# Altium PCB G1017 G1015 67x39x22mm.PcbDoc
Units mm, origin at the board's own origin, x right, y up, seen from the top; angles counter-clockwise.
Board outline 66.99 x 39 mm, 2 copper layers (Top Layer, Bottom Layer); 32 components, 19 nets, 73 pads, 2 vias.
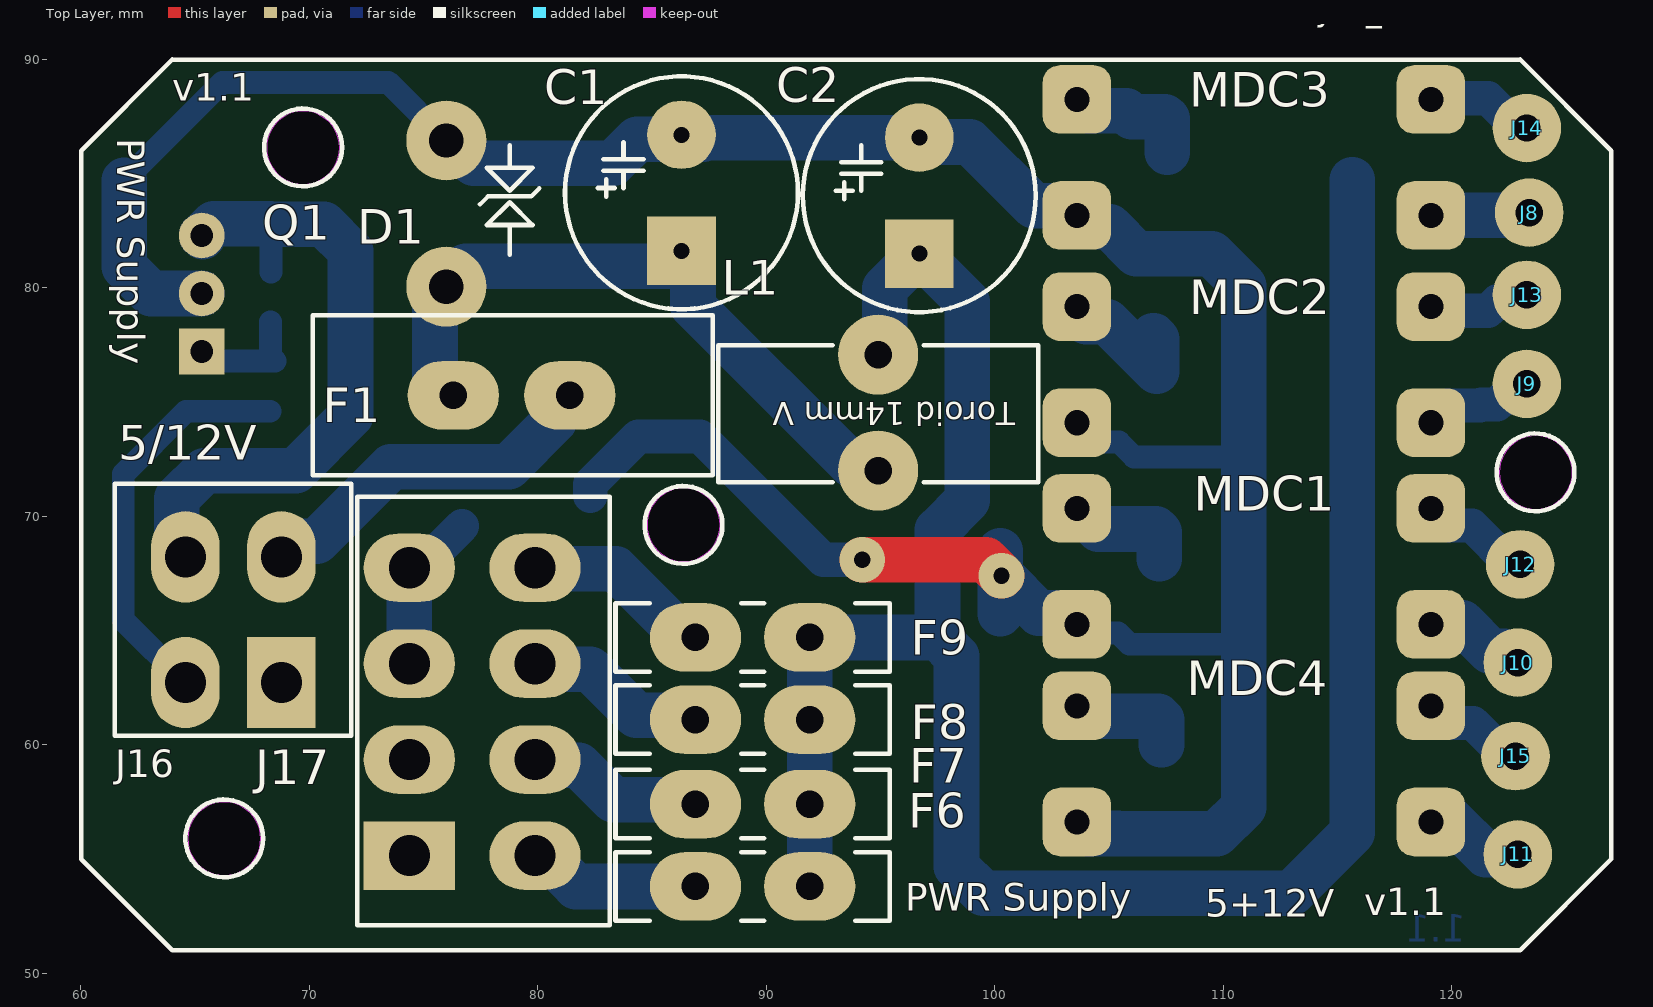
[diagram p0: Top Layer view]
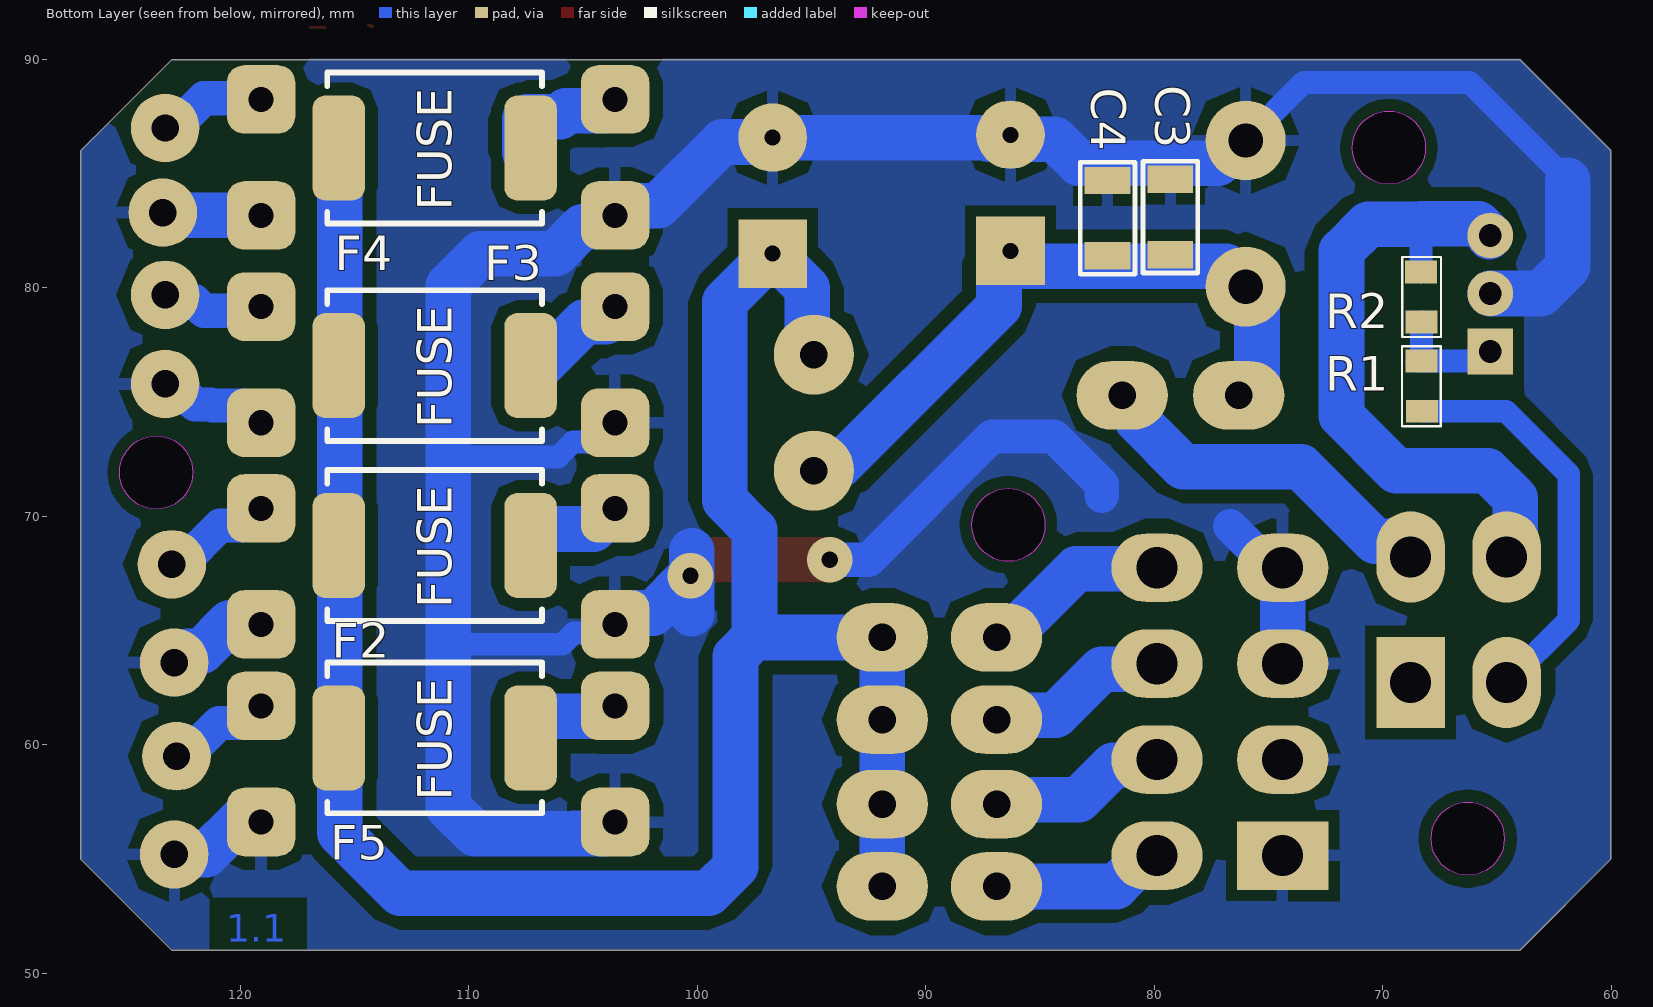
[diagram p1: Bottom Layer view, seen from below]

## Layer stack, top to bottom
Top Solder: solder mask 0.0102, Solder Resist, Dk 3.5
Top Layer: signal copper 0.0356
Dielectric 1: dielectric 0.32, FR-4, Dk 4.8
Bottom Layer: signal copper 0.0356
Bottom Solder: solder mask 0.0102, Solder Resist, Dk 3.5

## Board outline
60.006,55 60.006,86 60.006,86.006 64,90 123,89.998 123,90 127,86 127,55 123,51 64,51
cut-out: 122.088,71.922 ccw(c123.688,71.922) 123.688,70.322 ccw(c123.688,71.922) 125.288,71.922 ccw(c123.688,71.922) 123.688,73.522 ccw(c123.688,71.922)
cut-out: 84.781,69.631 ccw(c86.381,69.631) 86.381,68.031 ccw(c86.381,69.631) 87.981,69.631 ccw(c86.381,69.631) 86.381,71.231 ccw(c86.381,69.631)
cut-out: 68.128,86.138 ccw(c69.728,86.138) 69.728,84.538 ccw(c69.728,86.138) 71.328,86.138 ccw(c69.728,86.138) 69.728,87.738 ccw(c69.728,86.138)
cut-out: 64.672,55.888 ccw(c66.272,55.888) 66.272,54.288 ccw(c66.272,55.888) 67.872,55.888 ccw(c66.272,55.888) 66.272,57.488 ccw(c66.272,55.888)

## Design rules (kind name [scope] priority, off if disabled: settings)
Clearance [All] p1: gap=0.5 ignorepadtopadclearanceinfootprint=FALSE
ComponentClearance [All] p1: gap=0.01 collisioncheckmode=3 verticalgap=0.2 showdistances=FALSE
Height [All] p1: minheight=0 maxheight=25 prefheight=12.7
HoleSize [All] p1: absolutevalues=TRUE maxlimit=3.2 minlimit=0.4 maxpercent=80.000 minpercent=20.000
HoleToHoleClearance [All] p1: gap=0.2 allowstackedmicrovias=TRUE
PlaneClearance [All] p1: clearance=1
PlaneConnect [All] p1: planeconnectstyle=Relief reliefexpansion=0.508 reliefentries=4 reliefconductorwidth=0.5 reliefairgap=0.5
PolygonConnect [All] p1: connectstyle=Relief reliefconductorwidth=0.5 reliefentries=4 polygonreliefangle="90 Angle" airgapwidth=0.5
RoutingVias [All] p1: holewidth=0.7 width=1.5 viastyle="Through Hole" minholewidth=0.4 minwidth=0.4 maxholewidth=3.2 maxwidth=7
SilkToSilkClearance [All] p1: silktosilkclearance=0.05
SilkToSolderMaskClearance [IsPad] p1: minsilkscreentomaskgap=0.2 clearancetoexposedcopper=TRUE
SolderMaskExpansion [All] p1: expansion=0.1 istentingtop=FALSE
Width [All] p1: maxlimit=3 minlimit=0.2 preferedwidth=0.5
22 further rules are at their usual default settings.

## Components (designator, comment, footprint, x,y, rotation, side; value= is the part's Value field where it differs from the comment)
C1 "25V 1000uF" "Cap E p5.08mm D10.2mm (3p)" 86.29,81.625 r90 top
C2 "25V 1000uF" "Cap E p5.08mm D10.2mm (3p)" 96.7,81.5 r90 top
C3 "10nF" "SMD 1206 (3216)" 79.29,81.455 r90 bottom
C4 "100nF" "SMD 1206 (3216)" 82.04,81.405 r90 bottom
D1 "1.5KE20CA" "TVS diode DO-201 V" 75.993,86.455 r270 top
F1 "A" "Fuse RGE1100" 81.4,75.3 r270 top
F2 "2.5A" "Fuse SM250" 115.7,68.725 r180 bottom
F3 "2.5A" "Fuse SM250" 115.7,76.6 r180 bottom
F4 "2.5A" "Fuse SM250" 115.7,86.125 r180 bottom
F5 "2.5A" "Fuse SM250" 115.7,60.3 r180 bottom
F6 "3A" "Fuse MF-R300 (3A)" 86.9,53.8 r90 top
F7 "3 A" "Fuse MF-R300 (3A)" 86.9,57.4 r90 top
F8 "3 A" "Fuse MF-R300 (3A)" 86.9,61.1 r90 top
F9 "3 A" "Fuse MF-R300 (3A)" 86.9,64.7 r90 top
J8 "OnePinC" "OnePin 1.2x3" 123.4,83.3 r0 top
J9 "OnePinC" "OnePin 1.2x3" 123.3,75.8 r0 top
J10 "OnePinC" "OnePin 1.2x3" 122.9,63.6 r0 top
J11 "OnePinC" "OnePin 1.2x3" 122.9,55.2 r0 top
J12 "OnePinC" "OnePin 1.2x3" 123,67.9 r0 top
J13 "OnePinC" "OnePin 1.2x3" 123.3,79.7 r0 top
J14 "OnePinC" "OnePin 1.2x3" 123.3,87 r0 top
J15 "OnePinC" "OnePin 1.2x3" 122.8,59.5 r0 top
J16 "connector" "Molex Mini-Fit Jr - 4Pin V" 64.575,62.725 r90 top
J17 "connector" "Molex Mini-Fit Jr - 8Pin V" 74.375,63.55 r0 top
L1 "Inductor V" "Toroid V D14-W6" 94.9,72 r90 top value=700uH
MDC1 "DC-DC" "DC-DC_MP1584N (SMALL R)" 103.6,70.349 r0 top
MDC2 "DC-DC" "DC-DC_MP1584N (SMALL R)" 103.6,79.18 r0 top
MDC3 "DC-DC" "DC-DC_MP1584N (SMALL R)" 103.6,88.252 r0 top
MDC4 "DC-DC" "DC-DC_MP1584N (SMALL R)" 103.6,61.7 r0 top
Q1 "IRF3205 PBf" TO220-2 65.29,77.215 r0 top
R1 "100 Om" "SMD 0805 (2012)" 68.275,74.675 r90 bottom
R2 "10k Om" "SMD 0805 (2012)" 68.315,80.63 r270 bottom

## Footprints (in the part's own frame and the unit in brackets; to place one, negate y for a bottom-side part, rotate by r counter-clockwise, add the part's x,y. Pads: shape width x height; smd on the part's side, far side on the other; paste and mask are expansions set on the pad)
"Cap E p5.08mm D10.2mm (3p)" [mm] "D 10.2mm; H 17.5mm, Hole: 0.7mm"
  rect 3x3 hole 0.7: 1(0,0)
  round 3 hole 0.7: 2(5.08,0)
  silkscreen extent -2.56,-5.1 7.64,5.1, body extent -2.49,-4.97 7.57,5.08, height 16.53
"DC-DC_MP1584N (SMALL R)" [mm]
  rrect50% 3x3 hole 1.1: GND(0,-5.08) GND(15.5,-5.08) IN(0,0) Out(15.5,0)
  body extent -1.27,-6.35 16.84,1.25, height 11.8
"Fuse MF-R300 (3A)" [mm] "Resettable 11A"
  oval 3x4 hole 1.2: 1(0,0) 2(0,-5)
  silkscreen extent -1.5,-8.5 1.5,3.5, body extent -1.53,-6.19 1.43,1.39, height 15
"Fuse RGE1100" [mm] "Resettable 11A"
  oval 3x4 hole 1.2: 1(0,0) 2(0,-5.1)
  silkscreen extent -3.5,-11.25 3.5,6.25, body extent -1.53,-6.19 1.43,1.39, height 15
"Fuse SM250" [mm] "Resettable 11A"
  rrect50% 2.3x4.6 smd: 1(0,0) 2(8.4,0)
  silkscreen extent -0.5,-3.3 8.9,3.3, body extent -0.5,-3.35 8.9,3.36, height 3
"Molex Mini-Fit Jr - 4Pin V" [mm] "Molex Mega-Fit"
  rect 4x3 hole 1.8: 1(0,-4.2)
  oval 4x3 hole 1.8: 2(0,0) 3(5.5,-4.2) 4(5.5,0)
  silkscreen extent -2.32,-7.25 8.7,3.1, body extent -2.27,-7.27 8.73,3.12, height 12.8
"Molex Mini-Fit Jr - 8Pin V" [mm] "Molex Mega-Fit"
  rect 4x3 hole 1.8: 1(0,-8.4)
  oval 4x3 hole 1.8: 2(0,-4.2) 3(0,0) 4(0,4.2) 5(5.5,-8.4) 6(5.5,-4.2) 7(5.5,0) 8(5.5,4.2)
  silkscreen extent -2.27,-11.45 8.77,7.3, body extent -2.27,-11.5 8.73,7.3, height 12.8
"OnePin 1.2x3" [mm]
  round 3 hole 1.2: 1(0,0)
"SMD 0805 (2012)" [mm]
  rect 1x1.4 smd: 1(-0.075,0) 2(2.125,0.025)
  silkscreen extent -0.72,-0.82 2.78,0.87, body extent 0.03,-0.6 2.03,0.65, height 0.45
"SMD 1206 (3216)" [mm]
  rect 1.2x2 smd: 1(0,0) 2(3.3,0)
  silkscreen extent -0.8,-1.2 4.1,1.2, body extent 0.05,-0.75 3.25,0.85, height 1
TO220-2 [mm]
  rect 2x2 hole 1: 1(0,0)
  round 2 hole 1: 2(0,2.54) 3(0,5.08)
  body extent -2.7,-2.65 1.8,7.75, height 19
"Toroid V D14-W6" [mm] "10mm Black ring TEC.ORG"
  round 3.5 hole 1.2: 1(0,0) 2(5.08,0)
  silkscreen extent -0.5,-7 5.5,7
"TVS diode DO-201 V" [mm] "6p, p15.24mm"
  round 3.5 hole 1.5: 1(0,0) 2(6.4,0)
  silkscreen extent 0.2,1.47 5,4.07, body extent -2.8,-2.8 7.09,2.8, height 15.69

## Part data
C1 C2: library part "Cap E 1000mF x 25V", "Capacitor"
C3 C4: library part "Cap Ceramic SMD (All)", "Capacitor"
D1: library part "TVS 1.5KE20CA", "1500W Transil (TVS Diode)", Pulse Power=1500W, Breakdown V="min 19 max 21", Load A=5, PackageReference=DO-201, Stand-Off V=17.1
F1 F2 F3 F4 F5 F6 F7 F8 F9: library part Fuse, "Round fuse"
J8 J9 J10 J11 J12 J13 J14 J15: library part "OnePin Connector", "Only pad"
J16: library part "Molex Mini-Fit Jr - 4 pin", "Right, Dbl line, Female"
J17: library part "Molex Mini-Fit Jr - 8 pin", "Right, Dbl line, Female"
L1: "Inductor Vertical", Code_IEC=1005, Code_JEITA=0402, LatestRevisionDate=29-May-2009, LatestRevisionNote="IPC-7351 Footprint Added.", PackageDescription="Chip Inductor", PackageReference=0402-A, Published=8-Jun-2000, Publisher="Altium Limited"
MDC1 MDC2 MDC3 MDC4: library part "DC-DC MP1584N", "DC-DC StepDown"
Q1: library part IRF3205, "N-Channel 55V - 0.008Ω - 110A", I d - Drain current (continuous) at TC = 25°C="110 A", I d - Drain current (continuous) at TC = 100°C="80 A", C ISS Входная емкость="3247 pF", C OSS Выходная емкость="781 pF", DataSheet=http://tec.org.ru/_bd/2/223_IRF3205.pdf, Monufacturer=IOR, Name="IRF3205 PBf", RDS Сопротивление Сток-Исток="0.008 Om", URL=http://tec.org.ru/board/49-1-0-223, V DSS (v)=55V, VGS Макс напр на гейте="+-20 V", VGS Порог Открытия="+2....+4 V"
R1 R2: library part "Res All Types"

## Via types
v1: diameter 2, hole 0.711, Top Layer to Bottom Layer, 2 vias

## Nets (pads, with @x,y where several pads share a name; then routed paths per layer and width w, separated by ;. In a path a pad name is that pad's centre, name@x,y a point inside that pad or via, vN(x,y) a via of type N, cw(c..) or ccw(c..) an arc to the next point about the centre after c; other vN are vias at no path point)
"+5V #1": J12.1 MDC1.Out | length 4.9
  Bottom Layer w1.5: MDC1.Out@119.146,70.349 119.896,69.599 120.895,69.599 122.594,67.9 J12.1
"+5V #2": J13.1 MDC2.Out | length 4.6
  Bottom Layer w1.5: MDC2.Out 119.28,79 121.6,79 122.013,79.413 123.013,79.413 J13.1
"+5V #3": J14.1 MDC3.Out | length 4.3
  Bottom Layer w1.5: MDC3.Out@119.592,88.252 119.64,88.3 121.594,88.3 122.894,87 J14.1
"+5V #4": J15.1 MDC4.Out | length 4.6
  Bottom Layer w1.5: MDC4.Out 119.85,60.95 120.944,60.95 122.394,59.5 J15.1
"+12 V RAW": C1.1 C3.1 C4.1 D1.2 F1.2 L1.1 | length 29.1
  Bottom Layer w2: F1.2@75.5,75.2 75.5,79.8 75.755,80.055 75.946,80.055 76.846,80.955 79.29,80.955 82.04,80.955 C1.1@85.79,80.955 ; C1.1 86.79,81.125 86.79,79.21 93.713,72.287 94.613,72.287 L1.1
+12V: F1.1 J16.3 | length 16.1
  Bottom Layer w2: J16.3 68.775,68.454 69.237,68.916 70.316,68.916 73.575,72.175 78.725,72.175 80.709,74.159 80.709,74.838 81.171,75.3 F1.1
"+12V No Noise": C2.1 F2.1 F3.1 F4.1 F5.1 F6.2 F7.2 F8.2 F9.2 L1.2 | length 97.2
  Bottom Layer w2: F6.2 F8.2 F9.2 97.5,64.7 ; L1.2@95.187,77.486 95.187,79.987 96.2,81 C2.1 98.8,79.4 98.8,70.7 97.5,69.4 97.5,64.7 ; F4.1@115.65,84.73 115.65,56.15 113,53.5 99.497,53.5 98.325,54.672 98.325,63.875 97.5,64.7
GND: C1.2 C2.2 C3.2 C4.2 D1.1 J8.1 J9.1 J10.1 J11.1 J17.1 J17.2 J17.3 J17.4 MDC1.GND MDC2.GND MDC3.GND MDC4.GND Q1.2 | length 161.6
  Top Layer w2: v1(94.2,68.1) 99.6,68.1 v1(100.3,67.4)
  Bottom Layer w1: 61.9,84.7 66.2,89 73.448,89 D1.1 ; MDC2.GND@103.6,74.1 104.446,73.254 105.446,73.254 106.1,72.6 110.9,72.6 ; MDC1.GND@103.646,65.269 104.015,64.9 105.4,64.9 105.9,64.4 110.9,64.4
  Bottom Layer w1.5: J17.4@74.803,67.7 76.677,69.573 ; 82.3,70.9 82.3,71.4 84.4,73.5 87.1,73.5 92.5,68.1 v1(94.2,68.1) ; MDC2.GND@119.1,74.1 119.85,74.85 121.25,74.85 121.3,74.9 121.994,74.9 122.894,75.8 J9.1
  Bottom Layer w2: 61.9,84.7 61.9,80.927 63.072,79.755 Q1.2 ; J17.2@74.311,59.414 J17.2 ; J17.3 J17.4 ; D1.1@76.196,86.455 77.196,85.455 83.29,85.455 84.349,86.514 87.231,86.514 87.165,86.58 C2.2 96.891,86.389 98.911,86.389 101.708,83.592 103.672,83.592 104.092,83.172 104.592,82.672 105.028,82.672 106.2,81.5 109.5,81.5 110.9,80.1 110.9,72.6 110.9,64.4 110.9,57.272 109.728,56.1 105.4,56.1 105.38,56.12 104.1,56.12 MDC4.GND@103.6,56.62 ; 100.25,65.75 100.25,68.5 ; v1(100.3,67.4) 101.931,65.769 103.146,65.769 MDC1.GND@103.646,65.269 ; MDC4.GND@119.1,56.62 119.165,56.685 120.015,56.685 121.5,55.2 J11.1 ; MDC1.GND@119.146,65.269 119.211,65.335 120.465,65.335 121.7,64.1 J10.1@122.3,64.1 ; MDC3.GND@119.592,83.172 119.606,83.186 122.936,83.186 J8.1@122.95,83.2
"GND In": J16.4 Q1.3 R2.1 | length 28.1
  Bottom Layer w1: R2.1 68.315,82.789
  Bottom Layer w2: J16.4@64.191,68.391 64.191,70.784 65.407,72 69.4,72 71.8,74.4 71.8,81.617 70.628,82.789 68.315,82.789 68.29,82.814 65.809,82.814 Q1.3 Q1.3@65.33,82.255
NetF2_2: F2.2 MDC1.IN | length 5.1
  Bottom Layer w2: MDC1.IN@103.646,70.349 104.545,69.45 107.05,69.45 107.2,69.3 F2.2@107.2,68.15
NetF3_2: F3.2 MDC2.IN | length 5.3
  Bottom Layer w2: MDC2.IN@104.019,78.522 104.928,78.522 F3.2@107.1,76.35 ; F3.2@106.95,77.9 107.1,77.75 F3.2@107.1,76.6
NetF4_2: F4.2 MDC3.IN | length 6.3
  Bottom Layer w2: MDC3.IN@103.471,88.7 103.471,88.381 104.1,87.752 105.748,87.752 106,87.5 107.45,87.5 107.55,87.4 F4.2@107.55,85.95
NetF5_2: F5.2 MDC4.IN | length 4.9
  Bottom Layer w2: MDC4.IN@103.8,61.75 104.3,61.25 107.15,61.25 107.3,61.1 F5.2@107.3,60
NetF6_1: F6.1 J17.5 | length 7.8
  Bottom Layer w2: J17.5@79.6,55.1 80.371,55.1 81.671,53.8 F6.1
NetF7_1: F7.1 J17.6 | length 8.1
  Bottom Layer w2: J17.6@79.6,59.3 79.791,59.109 81.791,59.109 83.309,57.591 86.709,57.591 F7.1
NetF8_1: F8.1 J17.7 | length 8.3
  Bottom Layer w2: J17.7@79.6,63.5 79.791,63.309 82.291,63.309 83.401,62.199 84.309,61.291 86.709,61.291 F8.1
NetF9_1: F9.1 J17.8 | length 8.3
  Bottom Layer w2: J17.8@79.875,67.7 83.4,67.7 86.4,64.7 F9.1
NetQ1_1: Q1.1 R1.2 R2.2 | length 5.1
  Bottom Layer w1: Q1.1 65.705,76.8 R1.2@68.29,76.8 ; R2.2 R1.2@68.29,76.8 ; R1.2@68.5,76.8 R1.2 R1.2@68.29,76.8
"ON Ingition": J16.2 R1.1 | length 17.8
  Bottom Layer w1: J16.2 61.85,65.45 61.85,71.85 64.6,74.6 R1.1
pads on no net: J16.1

## Polygon pours and split planes (outlines as drawn)
GND on Bottom Layer "GND_L02_P005" (solid, pour order 5): 63.982,51.041 59.982,55.041 59.982,86.041 63.982,90.041 122.982,90.041 126.982,86.041 126.982,55.041 122.982,51.041
no net on Bottom Layer "NONET_L02_P000" (solid, pour order 0): 65,52

## Other copper
Top Layer:
  text ".Layer_Name" at 111.975,91.7 h1
Bottom Layer:
  text ".Layer_Name" at 75,92 h1
  text "1.1" at 120.621,51.379 h1.2

## Silkscreen, mask and mechanical layers (free items; w line width, h text height)
Top Overlay:
  circle w0.2: c123.675,71.925 r1.706
  circle w0.2: c66.275,55.9 r1.706
  circle w0.2: c86.375,69.625 r1.706
  circle w0.2: c69.725,86.15 r1.706
  lines w0.2: 60.006,54.998 60.006,54.994 64,51 123,51 127,55 127,86 123,90 ; 60.006,55 60.006,86 60.006,86.006 64,90 123,89.998
  text ".Layer_Name" at 111.975,91.7 h1
  text "v1.1" at 64.004,88.204 h1.2
  text "PWR Supply" at 61.579,86.546 h1.2 r270
  text "5/12V" at 61.629,72.479 h1.52
  text "PWR Supply" at 96.079,52.729 h1.2
  text "v1.1" at 116.179,52.529 h1.2
  text "5+12V" at 109.225,52.475 h1.2
Bottom Overlay:
  text ".Layer_Name" at 75,92 h1
Top Solder:
  text ".Layer_Name" at 111.975,91.7 h1
Bottom Solder:
  text ".Layer_Name" at 75,92 h1
Mechanical 2:
  text "67 x 39 mm" at 61,95.25 h1
  text "G1015 / G1017 Masterkit Case" at 60.975,93.475 h1
  text ".Pcb_File_Name_No_Path" at 60.925,91.425 h1
Mechanical 3:
  text "67 x 39 mm" at 127,95.25 h1
  text "G1015 / G1017 Masterkit Case" at 126.975,93.475 h1
  text ".Pcb_File_Name_No_Path" at 126.925,91.425 h1

## Dimensions
60,51 to 127,51 on Mechanical 3
60,90 to 60,51 on Mechanical 3
60,90 to 60,51 on Mechanical 2
60,51 to 127,51 on Mechanical 2

## Text inside footprints (layer, text, board x,y; h text height)
F2: Bottom Overlay "FUSE" at 110.754,65.979 h1.52 r270
F3: Bottom Overlay "FUSE" at 110.754,73.854 h1.52 r270
F4: Bottom Overlay "FUSE" at 110.754,83.379 h1.52 r270
F5: Bottom Overlay "FUSE" at 110.754,57.554 h1.52 r270
L1: Top Overlay "Toroid 14mm V" at 100.9,75 h1 r180